# Altium PCB 2001A.PcbDoc
Units mil, origin at the board's own origin, x right, y up, seen from the top; angles counter-clockwise.
Board outline 6000 x 4000 mil, 2 copper layers (Top Layer, Bottom Layer); 61 components, 39 nets, 198 pads, 11 vias.
Unrouted connection lines stored in the file: 124.
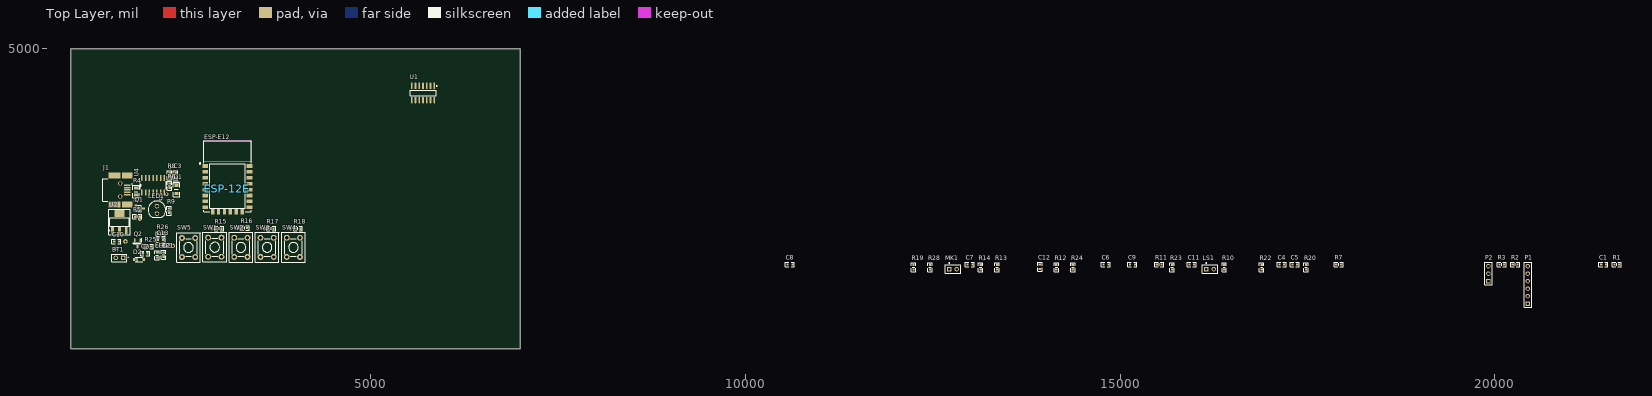
[diagram p0: Top Layer view]
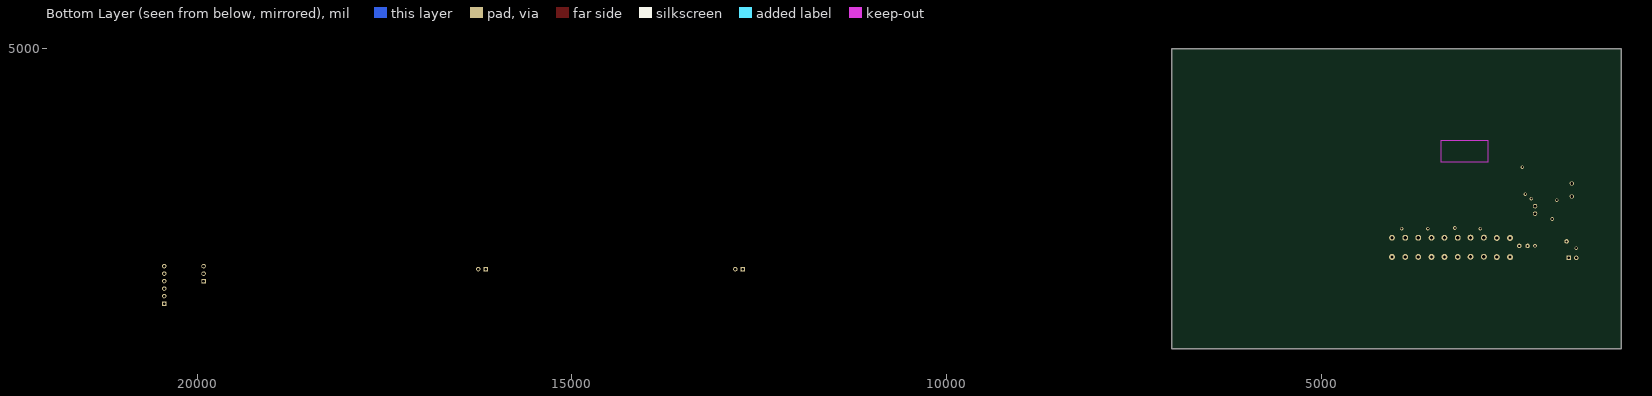
[diagram p1: Bottom Layer view, seen from below]

## Layer stack, top to bottom
Top Solder: solder mask 0.4, Solder Resist, Dk 3.5
Top Layer: signal copper 1.4
Dielectric 1: dielectric 12.6, FR-4, Dk 4.8
Bottom Layer: signal copper 1.4
Bottom Solder: solder mask 0.4, Solder Resist, Dk 3.5

## Board outline
1000,1000 7000,1000 7000,5000 1000,5000

## Design rules (kind name [scope] priority, off if disabled: settings)
Clearance [All] p1: gap=10 ignorepadtopadclearanceinfootprint=FALSE except(0: Arc-Hole Track-Hole SMDPad-Hole THPad-Hole Via-Hole Fill-Hole Poly-Hole Region-Hole Text-Hole)
PolygonConnect [All] p1: connectstyle=Relief reliefconductorwidth=10 reliefentries=4 polygonreliefangle="90 Angle" airgapwidth=10
RoutingVias [All] p1: holewidth=28 width=50 viastyle="Through Hole" minholewidth=28 minwidth=50 maxholewidth=28 maxwidth=50
SolderMaskExpansion [All] p1: expansion=4
Width [All] p1: maxlimit=10 minlimit=10 preferedwidth=10
30 further rules are at their usual default settings.

## Components (designator, comment, footprint, x,y, rotation, side; value= is the part's Value field where it differs from the comment)
BT1 "Battery" BAT-2 1650,2210 r180 top
C1 "Cap" 0603_CAP 21420,2120 r0 top value=10uF
C2 "Cap" 0603_CAP 2023.78,2270 r180 top value=10uF
C3 "Cap" 0603_CAP 2400,3343.78 r270 top value=0.1uF
C4 "Cap" 0603_CAP 17125,2120 r0 top value=10uF
C5 "Cap" 0603_CAP 17300,2120 r0 top value=10uF
C6 "Cap" 0603_CAP 14780,2120 r0 top value=10uF
C7 "Cap" 0603_CAP 12965,2120 r0 top value=100nF
C8 "Cap" 0603_CAP 10565,2120 r0 top value=1nF
C9 "Cap" 0603_CAP 15135,2120 r0 top value=1nF
C10 "Cap" 0603_CAP 1580,2430 r0 top value=10uF
C11 "Cap" 0603_CAP 15925,2120 r0 top value=100nF
C12 "Cap" 0603_CAP 13930,2060 r90 top value=100nF
C13 "Cap" 0603_CAP 2230,2450 r180 top value=10uF
D1 "" 0805_DIODE 2410,3065 r90 top
D2 "D Zener" *SOD-123_2_BZT52C4V7(Primary) 1910,2190 r0 top
ESP-12E "U3" XCVR_ESP8266-12E/ESP-12E 3090,3160 r0 top value=U?
J1 "67503-1020" 67503-1020 1427.72,3116.61 r0 top
LED1 "RED" LED_THT_RED 2150,2900 r270 top
LED2 "RED" 0603 2150,2216.22 r90 top
LS1 "Speaker" PIN2 16150,2060 r0 top
MK1 "Mic" PIN2 12720,2060 r0 top
P1 "PROGRAM" HDR1X6 20440,1600 r90 top
P2 "HDR1X3" HDR1X3 19915,1900 r90 top
Q1 "BFT92" SOT23-3 1920,2870 r90 top
Q2 "AO3409" SOT95P237X112-3N 1890,2403.31 r270 top
R1 "10k" 0603 21595,2120 r0 top
R2 "10k" 0603 20240,2120 r0 top
R3 "10k" 0603 20060,2120 r0 top
R4 "0.2" 0805 1870,3140 r270 top
R5 "1k" 0603 1856.22,2760 r0 top
R6 "1k" 0603 2320,3203.78 r270 top
R7 "1k" 0603 17885,2120 r0 top
R8 "1k" 0603 2320,3280 r90 top
R9 "2k" 0603 2310,2806.22 r90 top
R10 "10k" 0603 16390,2055 r90 top
R11 "1k" 0603 15490,2120 r0 top
R12 "47k" 0603 14150,2055 r90 top
R13 "1k" 0603 13360,2055 r90 top
R14 "100k" 0603 13140,2055 r90 top
R15 "10k" 0603 3010,2600 r180 top
R16 "10k" 0603 3353.78,2610 r180 top
R17 "10k" 0603 3703.78,2600 r180 top
R18 "10k" 0603 4063.78,2600 r180 top
R19 "100k" 0603 12245,2055 r90 top
R20 "10k" 0603 17480,2055 r90 top
R21 "2k" 0603 2240,2220 r90 top
R22 "100k" 0603 16890,2055 r90 top
R23 "10k" 0603 15695,2055 r90 top
R24 "10k" 0603 14370,2055 r90 top
R25 "100k" 0603 2006.22,2360 r0 top
R26 "10k" 0603 2230,2530 r180 top
R28 "10k" 0603 12465,2055 r90 top
SW1 "SW_VOL-" Micro_Switch 2921.42,2352.05 r0 top
SW2 "SW_VOL-" Micro_Switch 3270,2350 r0 top
SW3 "SW_VOL-" Micro_Switch 3620,2350 r0 top
SW4 "SW_VOL-" Micro_Switch 3970,2350 r0 top
SW5 "SW_VOL+" Micro_Switch 2571.42,2347.95 r0 top
U1 "LM324" SOIC14 5700,4410 r270 top
U2 "LM1117MP-3V3" SOT223 1650,2690 r90 top
U4 "BQ2057CSN" SOIC127P600X175-14N 2100,3177 r90 top

## Footprints (in the part's own frame and the unit in brackets; to place one, negate y for a bottom-side part, rotate by r counter-clockwise, add the part's x,y. Pads: shape width x height; smd on the part's side, far side on the other; paste and mask are expansions set on the pad)
0603 [mil]
  rect 28x30 smd: 1(0,0) 2(63.78,0)
  silkscreen extent -28,-30 92,30, body extent 0,-16 64,16, height 32
0603_CAP [mil]
  rect 28x30 smd: 1(0,0) 2(63.78,0)
  silkscreen extent -30,-30 90,30, body extent 0,-16 64,16, height 32
0805 [mm] "(2012 metric)"
  rect 1.05x1.3 smd: 1(0,0) 2(2.35,0)
  silkscreen extent -0.98,-1.12 3.28,1.12, body extent 0.15,-0.64 2.17,0.64, height 0.81
0805_DIODE [mm]
  rect 1.05x1.3 smd: 1(0.127,0) 2(2.858,0)
  silkscreen extent -0.98,-1.12 4.09,1.12, body extent 0.41,-0.64 2.43,0.64, height 0.81
67503-1020 [mm]
  rect 2.25x0.5 smd: 1(8.225,1.6) 2(8.225,0.8) 3(8.225,0) 4(8.225,-0.8) 5(8.225,-1.6)
  round 1.45 hole 0.95: 6(5.9,2.2) 7(5.9,-2.2)
  rect 4x2.05 smd: 8(4,-4.925) 11(4,4.925)
  rect 3.5x2.05 smd: 9(8.25,-4.925) 10(8.25,4.925)
  silkscreen extent 0,-3.85 9.95,3.85, body extent 0,-4.95 9,4.95, height 3.93
*SOD-123_2_BZT52C4V7(Primary) [mm]
  rect 0.9x0.95 smd: A(1.575,0) C(-1.575,0)
  silkscreen extent -1.3,-0.77 1.3,0.77, body extent -1.85,-0.78 1.85,0.78, height 1.36
BAT-2 [mm] "Battery; 2 Leads"
  rect 1.5x1.5 hole 0.9: 1(-1.27,0)
  round 1.5 hole 0.9: 2(1.27,0)
  silkscreen extent -2.54,-1.27 2.54,1.27
HDR1X3 [mm] "Connector; Header; 3 Position"
  rect 1.5x1.5 hole 0.9: 1(0,0)
  round 1.5 hole 0.9: 2(2.54,0) 3(5.08,0)
  silkscreen extent -1.27,-1.27 6.35,1.27, body extent -1.27,-1.24 6.35,1.3, height 8.54
HDR1X6 [mm] "Connector; Header; 6 Position"
  rect 1.5x1.5 hole 0.9: 1(0,0)
  round 1.5 hole 0.9: 2(2.54,0) 3(5.08,0) 4(7.62,0) 5(10.16,0) 6(12.7,0)
  silkscreen extent -1.27,-1.27 13.97,1.27, body extent -1.27,-1.27 13.97,1.27, height 8.54
LED_THT_RED [mm]
  round 1.5 hole 0.9: 1(0,0) 2(2.54,0)
  silkscreen extent -1.73,-3 3.84,3, body extent -1.63,-2.87 3.77,2.93, height 8.97
Micro_Switch [mm] "Micro Switch with 2 leads used"
  round 2 hole 1.1: 1(-2.25,3.25) 2(2.25,3.25) 3(-2.25,-3.25) 4(2.25,-3.25)
  silkscreen extent -4,-5 4.06,5.08, body extent -3,-3.3 3,3.1, height 4.1
PIN2 [mm] "Photosensitive Diode; 2 Leads"
  rect 1.5x1.5 hole 0.9: 1(0,0)
  round 1.5 hole 0.9: 2(2.54,0)
  silkscreen extent -1.4,-1.4 3.94,2.17
SOIC14 [mm] "SOIC, 14-Leads, Body 8.6x3.9mm, Pitch 1.27mm, IPC Medium Density"
  oval 2.2x0.6 smd: 1(-2.4,3.81) 2(-2.4,2.54) 3(-2.4,1.27) 4(-2.4,0) 5(-2.4,-1.27) 6(-2.4,-2.54) 7(-2.4,-3.81) 8(2.4,-3.81) 9(2.4,-2.54) 10(2.4,-1.27) 11(2.4,0) 12(2.4,1.27) 13(2.4,2.54) 14(2.4,3.81)
  silkscreen extent -2.52,-4.4 0.9,4.79, body extent -3,-4.4 3,4.3, height 1.8
SOIC127P600X175-14N [mil]
  rect 78x20 smd: 1(-97,150) 2(-97,100) 3(-97,50) 4(-97,0) 5(-97,-50) 6(-97,-100) 7(-97,-150) 8(97,-150) 9(97,-100) 10(97,-50) 11(97,0) 12(97,50) 13(97,100) 14(97,150)
  silkscreen extent -53,-172 53,172, body extent -117,-170 119,171, height 78
SOT23-3 [mm] "SOT23-3"
  round 0.2 on Top Overlay: 1(-1.5,-0.55)
  rect 0.6x1 smd: 1(0.95,1.3) 2(-0.95,1.3) 3(0,-1.3)
  silkscreen extent -1.15,-0.45 1.15,0.45, body extent -1.45,-1.4 1.45,1.4, height 1.3
SOT95P237X112-3N [mm]
  rect 1.2x0.6 smd: 1(-1.1,0.95) 2(-1.1,-0.95) 3(1.1,0)
  silkscreen extent -1.7,-1.46 0.15,1.5, body extent -1.18,-1.46 1.18,1.46, height 1.12
SOT223 [mm]
  rect 2.4x1 smd: 1(-2.9,2.3) 2(-2.9,0) 3(-2.9,-2.3)
  rect 2.4x3.3 smd: 4(2.9,0)
  silkscreen extent -4.35,-3.6 4.35,3.6, body extent -3.45,-3.3 3.3,3.2, height 1.8
XCVR_ESP8266-12E/ESP-12E [mm]
  rect 2x1.2 smd: 1(-7.5,7) 2(-7.5,5) 3(-7.5,3) 4(-7.5,1) 5(-7.5,-1) 6(-7.5,-3) 7(-7.5,-5) 8(-7.5,-7) 15(7.5,-7) 16(7.5,-5) 17(7.5,-3) 18(7.5,-1) 19(7.5,1) 20(7.5,3) 21(7.5,5) 22(7.5,7)
  rect 1.1x1.7 smd: 9(-5,-8.5) 10(-3,-8.5) 11(-1,-8.5) 12(1,-8.5) 13(3,-8.5) 14(5,-8.5)
  Keep-Out Layer region: 8,8.51 -8.009,8.51 -8.009,15.5 8,15.5
  Keep-Out Layer region: 8,8.51 -8.009,8.51 -8.009,15.5 8,15.5
  silkscreen extent -9.5,-8.5 8,15.5, body extent -8,-8.57 8,15.43, height 3.01

## Part data
BT1: "Multicell Battery", LatestRevisionDate=17-Jul-2002, LatestRevisionNote="Re-released for DXP Platform.", PackageDescription="Battery; 2 Leads", PackageReference=BAT-2, Published=24-Mar-1999, Publisher="Altium Limited"
C1 C2 C3 C4 C5 C6 C7 C8 C9 C10 C11 C12 C13: "Ceramic capacitor"
D1: library part 1N4148, "High-speed diode"
D2: "Zener Diode", LatestRevisionDate=17-Jul-2002, LatestRevisionNote="Re-released for DXP Platform.", PackageDescription="Diode, Thru-Hole; 2 Leads; 0.7 in Pin Spacing", PackageReference=DIODE-0.7, Published=8-Jun-2000, Publisher="Altium Limited"
ESP-12E: library part ESP8266-12E/ESP-12E, "This WiFi module has a 32-bit MCU micro and clock speeds supporting 80 MHz or 160 MHz. Supports the RTOS and integrated Wi-Fi MAC/BB/RF/PA/LNA, and has an on-board antenna.", Package=None, Availability=Unavailable, MF=AI-Thinker, MP=ESP8266-12E/ESP-12E, Price=None, SnapEDA_Link=https://www.snapeda.com/parts/ESP8266-12E/ESP-12E/AI-Thinker/view-part/106414/?ref=snap
J1: "Connector", Manufacturer_Name=Molex, Mouser Part Number=538-67503-1020, RS Part Number=1891440, Datasheet Link=http://docs-emea.rs-online.com/webdocs/13c4/0900766b813c46de.pdf, Manufacturer_Part_Number=67503-1020, Mouser Price/Stock=https://www.mouser.com/Search/Refine.aspx?Keyword=538-67503-1020, RS Price/Stock=http://uk.rs-online.com/web/p/products/1891440
LED1 LED2: library part LED, "Light-emitting diode", COLOR=RED
LS1: "Loudspeaker", LatestRevisionDate=17-Jul-2002, LatestRevisionNote="Re-released for DXP Platform.", PackageReference=PIN2, Published=24-Mar-1999, Publisher="Altium Limited"
MK1: library part Mic2, "Microphone", LatestRevisionDate=17-Jul-2002, LatestRevisionNote="Re-released for DXP Platform.", PackageReference=PIN2, Published=24-Mar-1999, Publisher="Altium Limited"
P1: library part HDR1X6, "Header, 6-Pin", LatestRevisionDate=17-Jul-2002, LatestRevisionNote="Re-released for DXP Platform.", Publisher="Altium Limited"
P2: "Header, 3-Pin", LatestRevisionDate=17-Jul-2002, LatestRevisionNote="Re-released for DXP Platform.", Publisher="Altium Limited"
Q1: library part 2N3906, "PNP General Purpose Amplifier", ComponentLink1Description="Manufacturer Link", ComponentLink1URL=http://www.fairchildsemi.com/, ComponentLink2Description=Datasheet, ComponentLink2URL=http://www.fairchildsemi.com/ds/2N%2F2N3906.pdf, DatasheetVersion=1997, LatestRevisionDate=15-Jan-2003, LatestRevisionNote="PCB Footprint 'BCY-W3/D4.7' replaced", PackageDescription="TO, Flat Index; 3 In-Line, Axial Leads; Body Dia. 4.5mm; Leads 0.51 x 0.48 mm (max)", PackageReference=TO-92A, PackageVersion=Sep-1998, Published=8-Jun-2000, Publisher="Altium Limited"
Q2: library part FDN340P, "MOSFET (P-Channel)", Manufacturer_Name="ON Semiconductor", Mouser Part Number=512-FDN340P, RS Part Number=6710435P, Datasheet Link=https://www.onsemi.com/pub/Collateral/FDN340P-D.PDF, Height=1.12mm, Manufacturer_Part_Number=FDN340P, Mouser Price/Stock=https://www.mouser.co.uk/ProductDetail/ON-Semiconductor-Fairchild/FDN340P?qs=AMp2PTjoga9dhzFXRaqTZw%3D%3D, RS Price/Stock=http://uk.rs-online.com/web/p/products/6710435P
R1 R2 R3 R4 R5 R6 R7 R8 R9 R10 R11 R12 R13 R14 R15 R16 R17 R18 R19 R20 R21 R22 R23 R24 R25 R26 R28: library part RES, "Resistior"
SW1 SW2 SW3 SW4 SW5: library part Micro_Switch, "Switch", LatestRevisionDate=17-Jul-2002, LatestRevisionNote="Re-released for DXP Platform.", PackageReference=SPST-2, Published=24-Mar-1999, Publisher="Altium Limited"
U1: library part LM339AD, "Quad Single-Supply Comparator", Code_IPC=SOIC127P600-14, ComponentLink1Description="Manufacturer Link", ComponentLink1URL=http://www.onsemi.com/site/products/taxonomy/0,4438,133,00.html, DatasheetVersion=1988, LatestRevisionDate=13-Apr-2006, LatestRevisionNote="IPC-7351 Footprint Added.", PackageDescription="14-Pin Small Outline Integrated Circuit 1.27 mm Pitch", PackageReference=751A-02, PackageVersion=1991, Published=17-Jul-2002, Publisher="Altium Limited"
U2: "800mA Low-Dropout Linear Regulator", DigiKeyPartNumber=LM1117MP-3.3CT-ND, Manufacturer="National Semiconductor", PackageTopMarking=XYTT*N05A, PartNumber=LM1117MP-3.3, PowerWise=N, Code_IPC=SOT223-4, Code_JEDEC=TO-261-AA, ComponentLink1Description="LM1117 Datasheet", ComponentLink1URL=http://www.national.com/ds/LM/LM1117.pdf, ComponentLink2Description="LM1117 Web Page", ComponentLink2URL=http://www.national.com/pf/LM/LM1117.html, ComponentLink3Description="MP04A Package Page", ComponentLink3URL=http://www.national.com/packaging/folders/mp04a.html, CompType="LDO IC", DatasheetVersion=Apr-2006, PackageDescription="Molded SOT-223, 6.50 x 3.56 x 1.6mm Body, 4 Lead, 2.3mm Pitch", PackageReference=MP04A, PackageVersion="revB, Apr-2003", PinCount=4, Published=4-Dec-2008, Publisher="Altium Limited", RoHS=O
U4: "Charger IC Lithium Ion/Polymer 8-SOIC", Package="SOIC-8 Texas Instruments", Availability=Unavailable, MF="Texas Instruments", MP=BQ2057CSN, Price=None, SnapEDA_Link=https://www.snapeda.com/parts/BQ2057CSN/Texas%20Instruments/view-part/237203/?ref=snap

## Free pads (board coordinates)
  round 60 hole 30: 1(2360,2370) 2(2250,2370) 3(1730,2430)

## Via types
v1: diameter 50, hole 28, Top Layer to Bottom Layer, 11 vias

## Nets (pads, with @x,y where several pads share a name; then routed paths per layer and width w, separated by ;. In a path a pad name is that pad's centre, name@x,y a point inside that pad or via, vN(x,y) a via of type N, cw(c..) or ccw(c..) an arc to the next point about the centre after c; other vN are vias at no path point)
+3V3: C1.1 C10.2 C11.1 C13.1 ESP-12E.8 P1.5 R1.2 R2.1 R3.1 R7.1 R12.2 R21.2 SW1.1 SW2.1 SW3.1 SW4.1 SW5.2 U1.3 U2.2
+BATT: BT1.1 C2.2 D1.1 J1.1 Q1.3 Q2.3 U4.2
ADC: ESP-12E.2 R14.2
BUTTON1: ESP-12E.5 R26.1 SW5.1
BUTTON2: ESP-12E.6 R15.1 SW1.2
BUTTON3: ESP-12E.7 R16.1 SW2.2
BUTTON4: ESP-12E.19 R17.1 SW3.2
BUTTON5: ESP-12E.20 R18.1 SW4.2
DTR: ESP-12E.18 P1.1 R2.2
GND: BT1.2 C1.2 C2.1 C3.1 C4.2 C5.2 C6.2 C9.1 C10.1 C12.1 C13.2 ESP-12E.15 ESP-12E.16 J1.4 J1.5 LED2.2 MK1.1 P1.6 R8.2 R9.2 R10.2 R15.2 R16.2 R17.2 R18.2 R25.2 R26.2 U1.12 U2.1 U4.6
NetC3_2: C3.2 D1.2 R4.1 R6.1 R8.1 U4.3 U4.8
NetC4_1: C4.1 R7.2 R11.1
NetC5_1: C5.1 R10.1 R12.1 U1.5
NetC6_1: C6.1 R11.2 R13.1
NetC7_1: C7.1 MK1.2 R13.2
NetC7_2: C7.2 C8.1 R19.1 U1.4
NetC8_2: C8.2 R14.1 R19.2 U1.2
NetC9_2: C9.2 R20.2 R23.2 U1.9
NetC11_2: C11.2 C12.2 R22.1 U1.11
NetD2_1: Q2.1 R25.1
NetD2_2: Q2.2 U2.3
NetESP-12E_3: ESP-12E.3 R1.1
NetESP-12E_17: ESP-12E.17 R3.2
NetLED1_1: LED1.1 U4.5
NetLED1_2: LED1.2 R9.1
NetLED2_1: LED2.1 R21.1
NetLS1_1: LS1.1 R24.2 U1.8 U1.14
NetLS1_2: LS1.2 R28.2 U1.1
NetQ1_1: Q1.1@1868.82,2907.4 R4.2 U4.1
NetQ1_2: Q1.2 R5.1
NetR5_2: R5.2 U4.7
  other v1: 1920,2730 2280,3060
NetR6_2: R6.2 U4.4
NetR23_1: R23.1 R24.1 R28.1 U1.6 U1.7 U1.10 U1.13
PIN1: ESP-12E.11 P2.1
PIN2: ESP-12E.12 P2.2
PIN3: ESP-12E.4 P2.3
RTS: ESP-12E.1 P1.4
RXD: ESP-12E.22 P1.2
TXD: ESP-12E.21 P1.3 R20.1 R22.2
pads on no net: D2.A D2.C ESP-12E.9 ESP-12E.10 ESP-12E.13 ESP-12E.14 J1.2 J1.3 J1.6 J1.7 J1.8 J1.9 J1.10 J1.11 Q1.1@1941.65,2810.94 SW1.3 SW1.4 SW2.3 SW2.4 SW3.3 SW3.4 SW4.3 SW4.4 SW5.3 SW5.4 U2.4 U4.9 U4.10 U4.11 U4.12 U4.13 U4.14
copper on no net:
  other v1: 1600,2340 2150,2370 2880,2600 3580,2600 3930,2600 3220,2610 1860,2980 2200,3000 2320,3420

## Text inside footprints (layer, text, board x,y; h text height)
BT1: Top Overlay "+" at 1794.49,2232.72 h45.28 r180
ESP-12E: Top Overlay "ESP-E12" at 2780,3795 h60